# EAGLE board comparator_circuit (EAGLE 7.2.0)
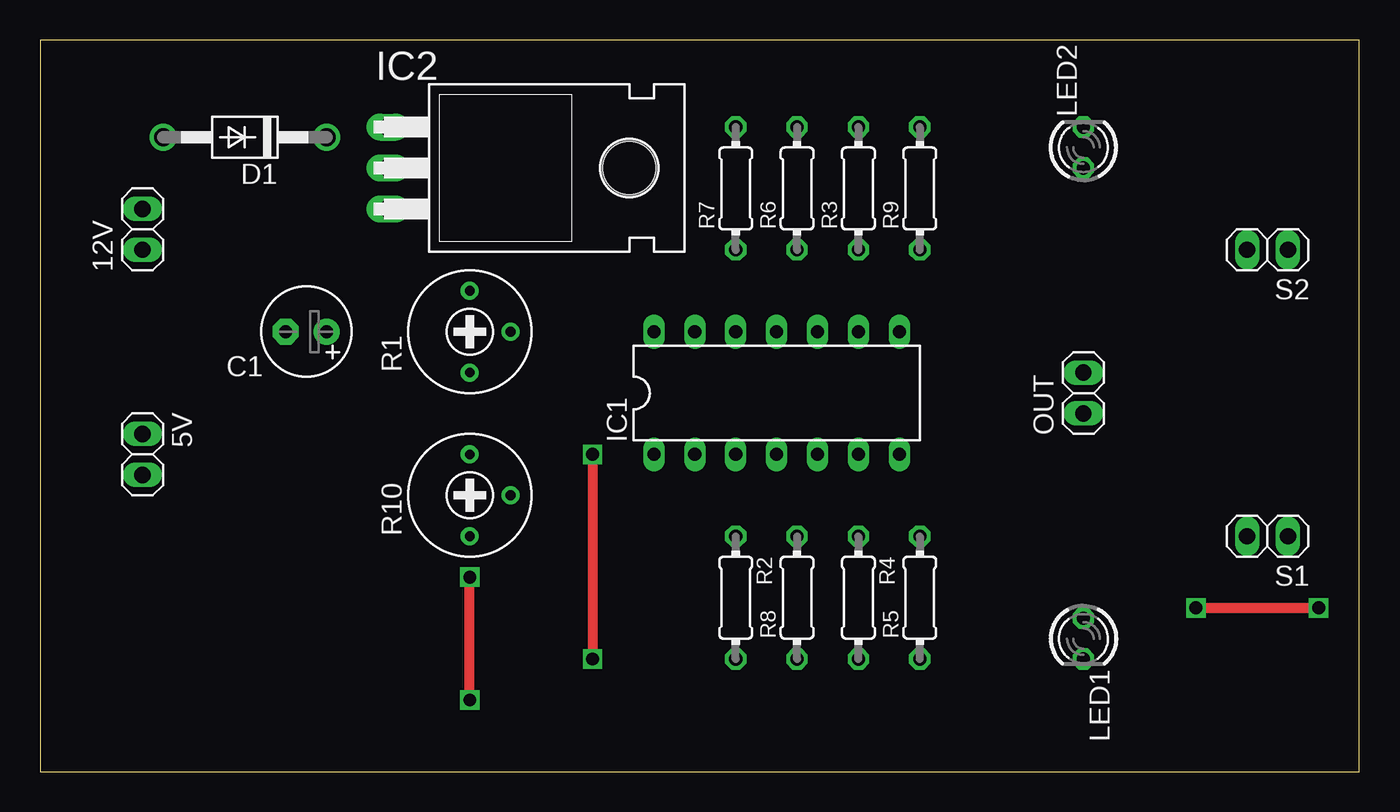
[diagram p0: board, top side]
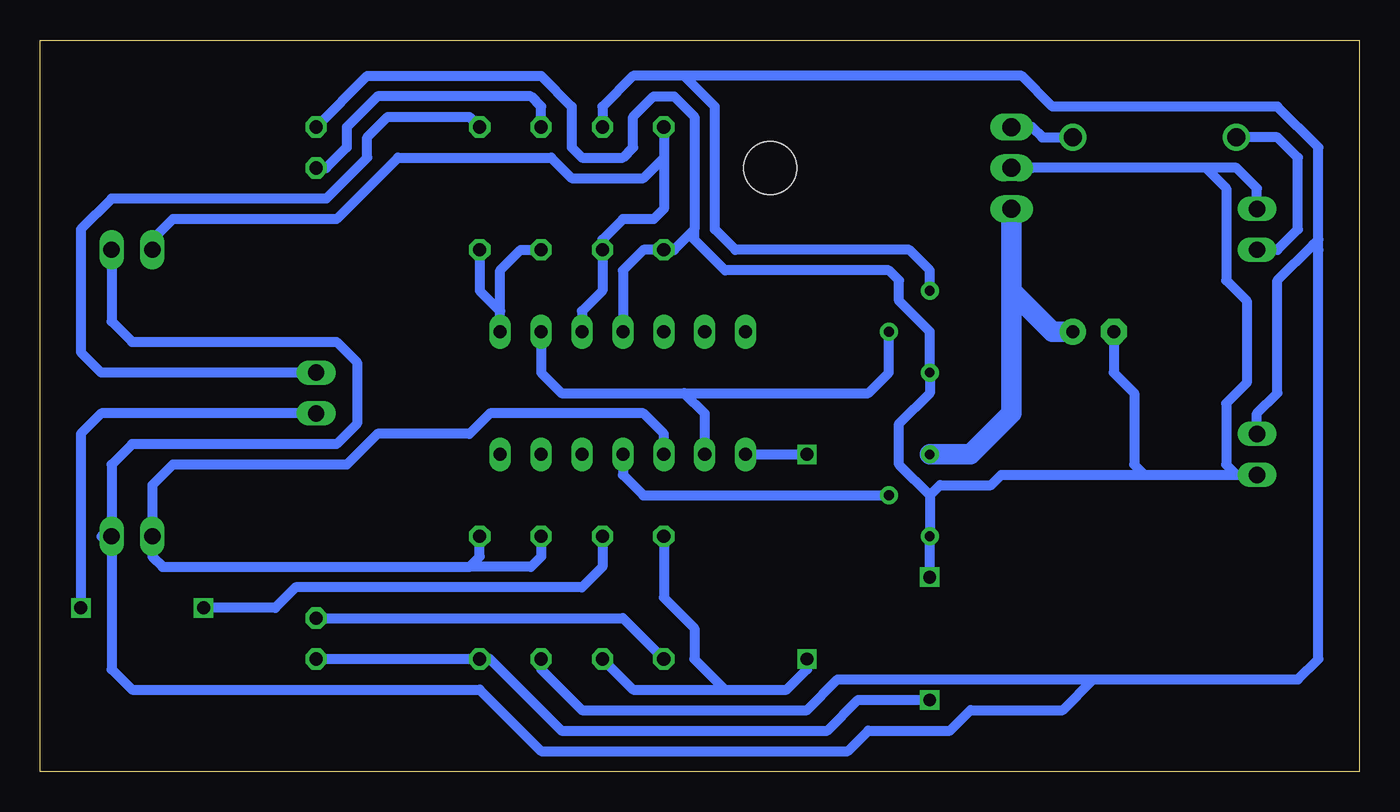
[diagram p1: board, bottom side, seen from below]

Size 81.9 x 45.39 mm. Coordinates in mm from the lower left corner, seen from the top.
Outline: 0,0 81.9,0 81.9,45.39 0,45.39 0,0
Copper layers (1*16): Top 0.035mm / dielectric 1.5mm / Bottom 0.035mm
Design rules "default *": minimum track width 10mil, minimum drill 24mil, track to track 8mil, track to pad 8mil, pad to pad 8mil, via to via 8mil, smd to smd 8mil, copper to edge 40mil, drill to drill 8mil, minimum pad ring 10mil, minimum via ring 8mil, stop-mask expansion 4mil, vias tented up to drill 0mil, thermal gap 10mil

## Footprints (pad centres in the part's own frame; a part is rotated, then mirrored left to right if it is on the bottom)
1X02 = drill 1.016 long: 1 -1.27,0; 2 1.27,0
E2,5-6 = drill 0.813 pad 1.6: + -1.27,0 | drill 0.813 pad 1.6 octagon: - 1.27,0
DO41-10 = drill 1.118: A 5.08,0; C -5.08,0
DIL14 = drill 0.813 long: 1 -7.62,-3.81; 2 -5.08,-3.81; 3 -2.54,-3.81; 4 0,-3.81; 5 2.54,-3.81; 6 5.08,-3.81; 7 7.62,-3.81; 8 7.62,3.81; 9 5.08,3.81; 10 2.54,3.81; 11 0,3.81; 12 -2.54,3.81; 13 -5.08,3.81; 14 -7.62,3.81
TO220H = drill 1.118 long: 1 -2.54,-10.16; 2 0,-10.16; 3 2.54,-10.16 | hole 3.302: 0,4.826
LED3MM = drill 0.813 octagon: A -1.27,0; K 1.27,0
RTRIM3339P = drill 0.61: 1 -2.54,0; 2 0,-2.54; 3 2.54,0
0204/7 = drill 0.813 octagon: 1 -3.81,0; 2 3.81,0

## Placement (x,y rotation side)
5V  [1X02]  6.35,19.68 270 top
12V  [1X02]  6.35,33.65 90 top
C1  [E2,5-6]  16.51,27.3 180 top
D1  1N4004  [DO41-10]  12.7,39.37 180 top
IC1  LM324N  [DIL14]  45.72,23.49 0 top
IC2  7808T  [TO220H]  31.75,37.46 270 top
LED1  [LED3MM]  64.77,8.25 270 top
LED2  [LED3MM]  64.77,38.73 90 top
OUT  [1X02]  64.77,23.49 90 top
R1  10k  [RTRIM3339P]  26.67,27.3 90 top
R2  330  [0204/7]  43.18,10.79 270 top
R3  330  [0204/7]  50.8,36.2 90 top
R4  1k2  [0204/7]  50.8,10.79 270 top
R5  1k2  [0204/7]  54.61,10.79 90 top
R6  1k2  [0204/7]  46.99,36.2 90 top
R7  1k2  [0204/7]  43.18,36.2 90 top
R8  470  [0204/7]  46.99,10.79 90 top
R9  470  [0204/7]  54.61,36.2 90 top
R10  10k  [RTRIM3339P]  26.67,17.14 90 top
S1  [1X02]  76.2,14.6 180 top
S2  [1X02]  76.2,32.38 180 top

## Library data of the parts
5V 12V OUT S1 S2 = pinhead
C1 R1-R10 = rcl
D1 = diode
IC1 IC2 = linear
LED1 LED2 = led

## Nets
5V: 5V.1 R1.3 R4.2 R6.2 S1.1 S2.1
9V: 12V.1 D1.A
GND: 5V.2 12V.2 C1.- IC1.11 IC2.2 LED1.K LED2.K R1.1 R5.1 R7.1 R10.1
N$1: IC1.2 IC1.9 R1.2
N$2: D1.C IC2.1
N$3: LED1.A R2.2
N$4: LED2.A R3.2
N$6: IC1.8 R3.1 R9.1
N$7: IC1.3 R4.1 R5.2 S1.2
N$8: IC1.10 R6.1 R7.2 S2.2
N$9: C1.+ IC2.3 R10.3
N$10: IC1.4 R10.2
N$13: OUT.1 R8.2
N$14: OUT.2 R9.2
N$21: IC1.1 R2.1 R8.1

## Tracks (layer width: path | path; a pad name or v marks a point on that pad's centre or on a via)
5V
  Bottom 0.61: 5V.1 6.35,22.22 5.08,23.49 5.08,30.48 2.86,32.7 | 2.86,32.7 2.54,33.02 | 2.54,33.02 2.54,38.73 5.08,41.27 19.05,41.27 20.96,43.18 41.91,43.18 | R6.2 46.99,41.27 45.09,43.18 41.91,43.18 | 16.51,5.71 32.38,5.71 34.29,3.81 48.26,3.81 50.8,6.35 R4.2 | 16.51,5.71 3.81,5.71 2.54,6.98 2.54,32.38 | 2.54,32.38 2.86,32.7 | R1.3 26.67,31.12 27.94,32.38 38.74,32.38 40.01,33.65 40.01,41.27 41.91,43.18 | 2.54,32.38 2.54,33.02 | S2.1 77.47,27.94 76.2,26.67 63.5,26.67 62.23,25.4 62.23,21.59 63.5,20.32 76.2,20.32 77.47,19.05 77.47,15.24 78.1,14.6 S1.1 77.47,6.35 76.2,5.08 54.61,5.08 50.8,1.27 31.75,1.27 30.48,2.54 25.4,2.54 24.13,3.81 18.41,3.81 16.51,5.71
9V
  Bottom 0.61: 12V.1 5.08,32.38 3.81,33.65 3.81,38.1 5.08,39.37 D1.A
GND  (via drill 0.8)
  Top 0.61: v26.67,4.45 v26.67,12.06
  Bottom 0.61: IC1.11 45.72,31.12 44.45,32.38 R7.1 42.55,32.38 41.59,33.34 | 26.67,17.14 28.57,19.05 28.57,21.59 26.67,23.49 R1.1 26.67,27.3 28.57,29.21 28.57,30.48 29.21,31.12 39.37,31.12 41.27,33.02 | 26.67,17.14 R10.1 v26.67,12.06 | 20.32,37.46 IC2.2 9.52,37.46 | 12V.2 6.35,36.2 7.62,37.46 9.52,37.46 | 9.52,37.46 8.26,36.2 8.26,30.48 6.98,29.21 6.98,24.13 8.26,22.86 8.26,19.05 7.62,18.41 | 7.62,18.41 5V.2 | C1.- 15.24,24.76 13.97,23.49 13.97,19.05 13.34,18.41 | 13.34,18.41 7.62,18.41 | 26.67,17.14 26.04,17.78 22.86,17.78 22.23,18.41 13.34,18.41 | LED1.K R5.1 53.98,6.98 49.53,2.54 33.02,2.54 31.12,4.45 v26.67,4.45 | 41.27,33.65 41.27,40.64 42.55,41.91 43.82,41.91 45.09,40.64 45.09,38.73 45.72,38.1 48.26,38.1 48.9,38.73 48.9,41.27 50.8,43.18 61.6,43.18 LED2.K | 41.27,33.65 41.59,33.34 | 41.27,33.02 41.59,33.34 | 41.27,33.02 41.27,33.65
N$1
  Bottom 0.61: IC1.9 50.8,24.76 49.53,23.49 41.91,23.49 | 41.91,23.49 40.64,22.22 IC1.2 | 41.91,23.49 30.48,23.49 29.21,24.76 R1.2
N$2
  Bottom 0.61: IC2.1 20.32,40.01 19.68,39.37 D1.C
N$3
  Bottom 0.61: LED1.A 45.72,9.52 R2.2
N$4
  Bottom 0.61: R3.2 50.8,41.27 51.43,41.91 60.96,41.91 62.87,40.01 62.87,38.73 64.13,37.46 LED2.A
N$6
  Bottom 0.61: IC1.8 53.34,28.57 | R9.1 54.61,29.84 53.34,28.57 | 53.34,28.57 53.34,31.12 52.07,32.38 R3.1
N$7
  Bottom 0.61: 55.24,12.7 74.3,12.7 74.93,13.34 S1.2 74.93,17.78 73.66,19.05 62.87,19.05 60.96,20.95 55.24,20.95 53.98,22.22 44.45,22.22 43.18,20.95 IC1.3 | 55.24,12.7 54.61,13.34 R5.2 | R4.1 50.8,13.34 51.43,12.7 55.24,12.7
N$8
  Bottom 0.61: IC1.10 48.26,28.57 46.99,29.84 R6.1 46.99,33.02 45.72,34.29 43.82,34.29 43.18,34.93 43.18,38.1 | R7.2 43.18,38.1 | S2.2 74.93,33.02 73.66,34.29 63.5,34.29 59.69,38.1 50.16,38.1 48.9,36.83 44.45,36.83 43.18,38.1
N$9
  Bottom 1.27: IC2.3 21.59,29.84 | 21.59,29.84 19.05,27.3 C1.+ | 21.59,29.84 21.59,22.22 24.13,19.68 R10.3
N$10
  Bottom 0.61: R10.2 38.1,17.14 39.37,17.14 44.45,17.14 45.72,18.41 IC1.4
N$13  (via drill 0.8)
  Top 0.61: v71.75,10.16 v79.38,10.16
  Bottom 0.61: OUT.1 78.1,22.22 79.38,20.95 v79.38,10.16 | R8.2 46.99,12.7 48.26,11.43 66.04,11.43 67.31,10.16 v71.75,10.16
N$14
  Bottom 0.61: OUT.2 78.1,24.76 79.38,26.04 79.38,33.65 77.47,35.56 64.13,35.56 61.6,38.1 61.6,39.37 60.32,40.64 55.24,40.64 R9.2
N$21  (via drill 0.8)
  Top 0.61: v34.29,19.68 v34.29,6.98
  Bottom 0.61: R8.1 45.09,5.08 39.37,5.08 | IC1.1 v34.29,19.68 | 39.37,5.08 35.56,5.08 34.29,6.35 v34.29,6.98 | R2.1 43.18,10.79 41.27,8.89 41.27,6.98 39.37,5.08